# Altium PCB ctrl_lumier_pcb_backup.PcbDoc
Units mil, origin at the board's own origin, x right, y up, seen from the top; angles counter-clockwise.
Board outline 3490 x 1960 mil, 2 copper layers (Top Layer, Bottom Layer); 35 components, 47 nets, 162 pads, 29 vias.
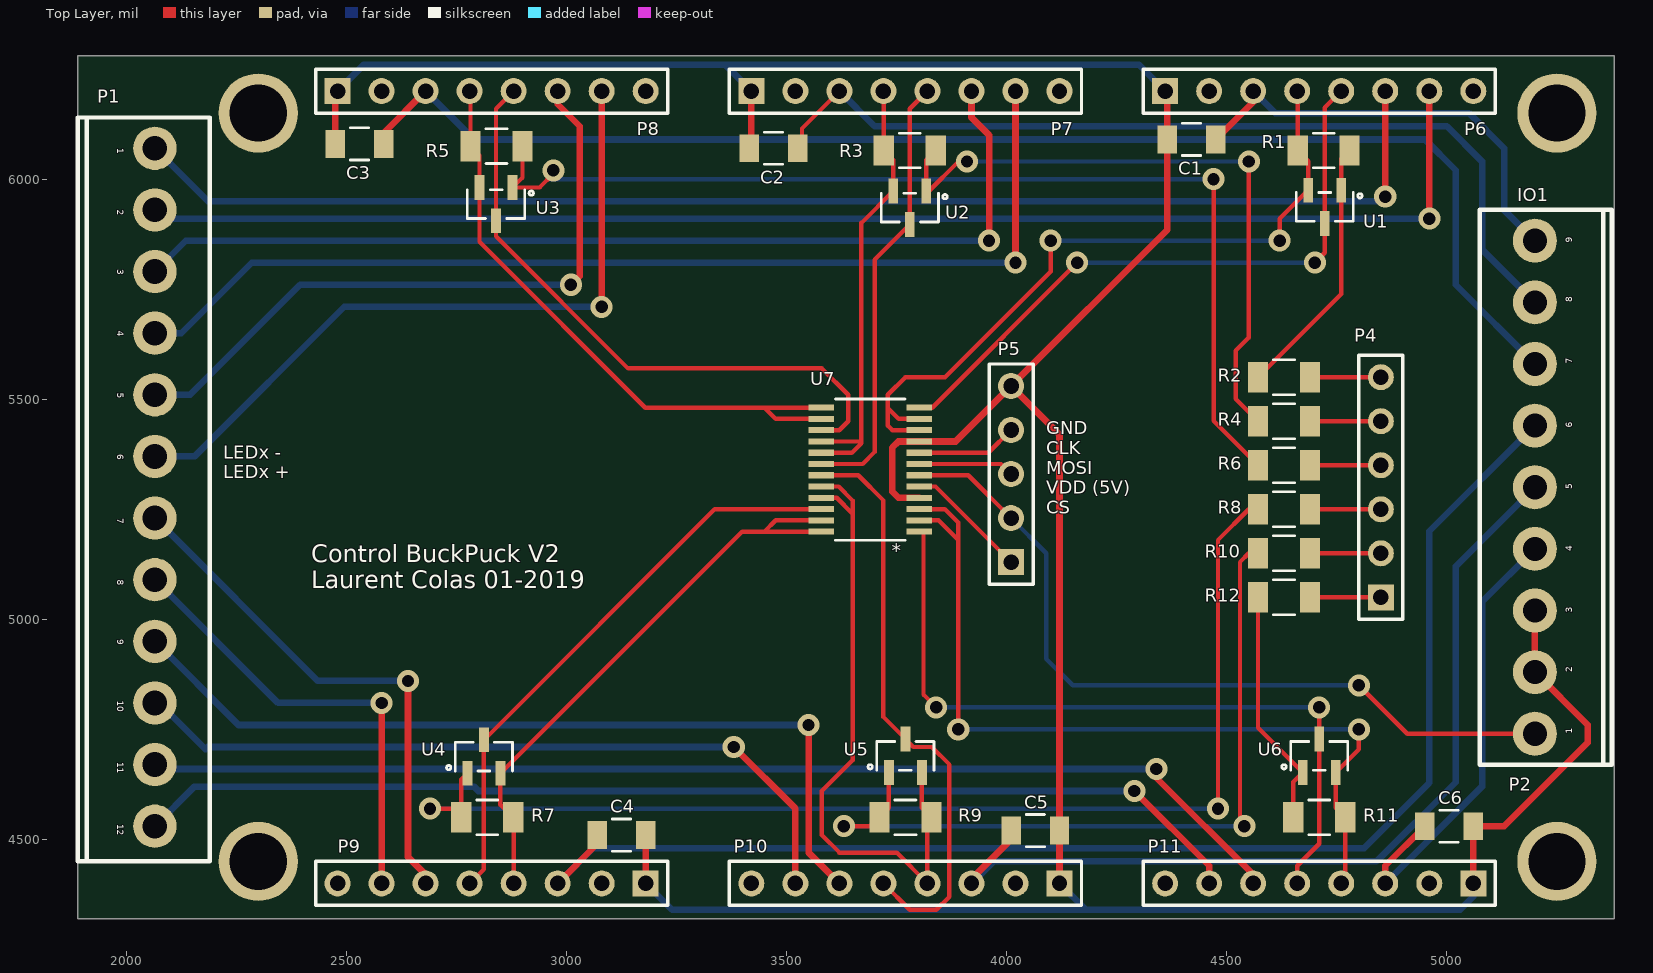
[diagram p0: Top Layer view]
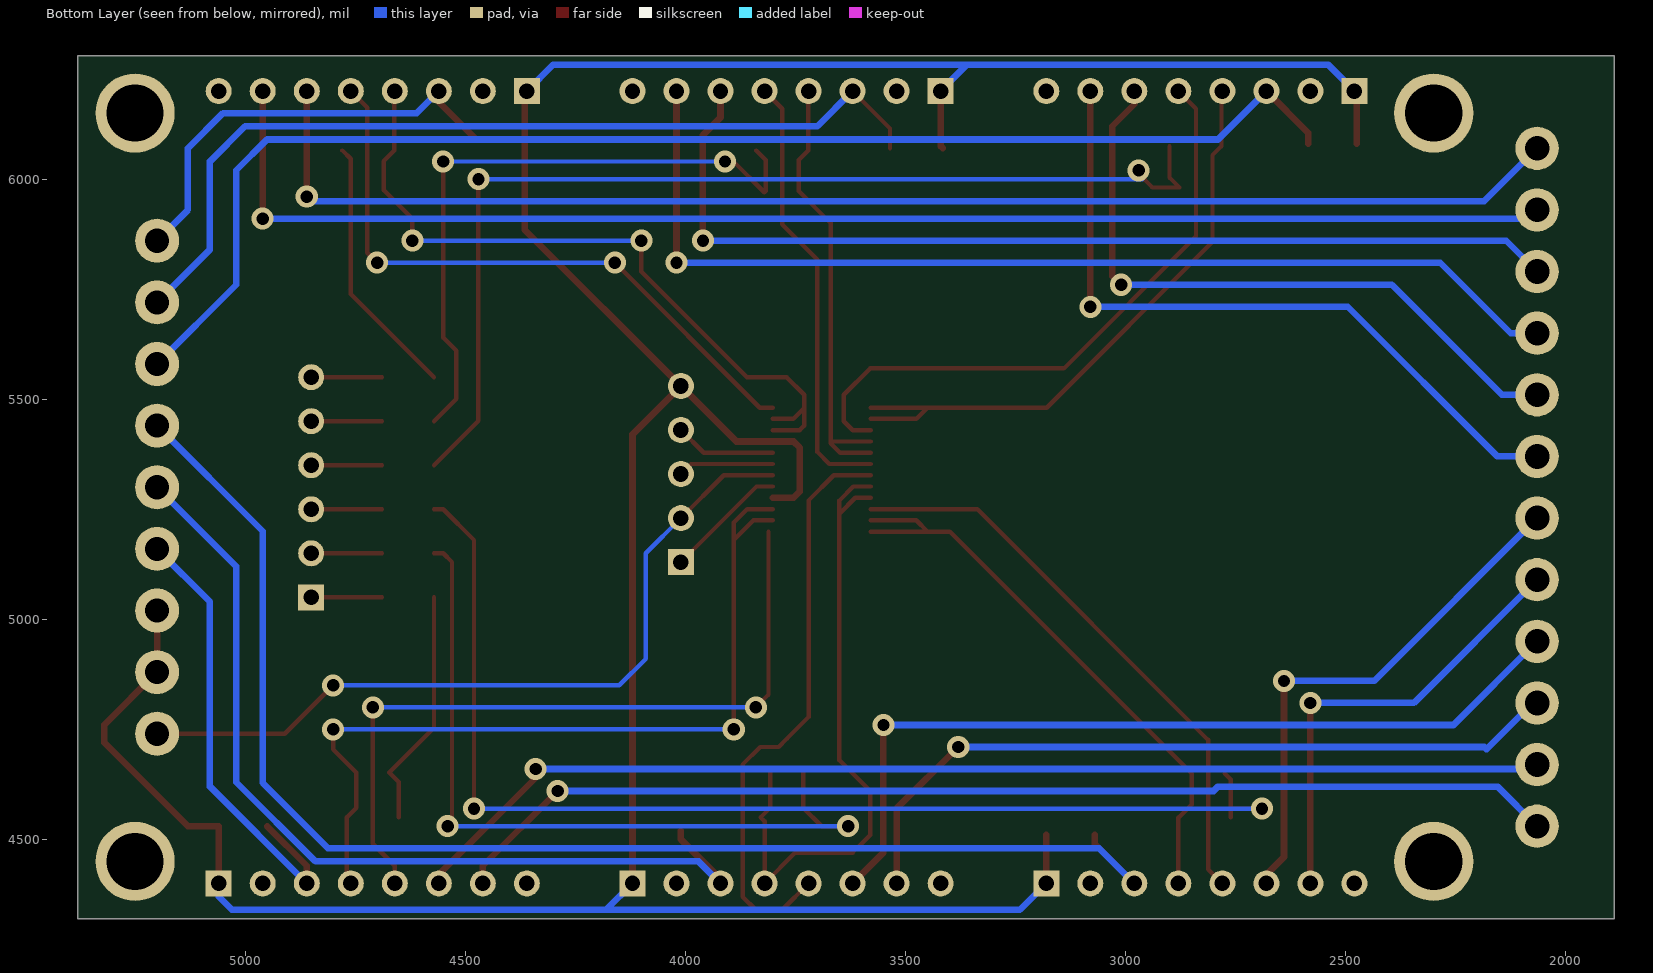
[diagram p1: Bottom Layer view, seen from below]

## Layer stack, top to bottom
Top Solder: solder mask 0.4, Solder Resist, Dk 3.5
Top Layer: signal copper 1.4
Dielectric 1: dielectric 12.6, FR-4, Dk 4.8
Bottom Layer: signal copper 1.4
Bottom Solder: solder mask 0.4, Solder Resist, Dk 3.5

## Board outline
1890,6280 5380,6280 5380,4320 1890,4320

## Design rules (kind name [scope] priority, off if disabled: settings)
Clearance [All] p1: gap=10 ignorepadtopadclearanceinfootprint=FALSE
ComponentClearance [All] p1: gap=0 collisioncheckmode=3 verticalgap=0 showdistances=FALSE
HoleSize [All] p1: absolutevalues=TRUE maxlimit=160 minlimit=1 maxpercent=80.000 minpercent=20.000
PolygonConnect PolygonConnect_5 [All vs IsNamedPolygon('GND_L02_P002')] p1: thpad.connectstyle=Direct thpad.reliefconductorwidth=10 thpad.reliefentries=4 thpad.polygonreliefangle="90 Angle" thpad.airgapwidth=10 smdpad.connectstyle=Direct smdpad.reliefconductorwidth=10 smdpad.reliefentries=4 smdpad.polygonreliefangle="90 Angle" smdpad.airgapwidth=10 via.connectstyle=Relief via.reliefconductorwidth=10 via.reliefentries=4 via.polygonreliefangle="90 Angle" via.airgapwidth=10
PolygonConnect PolygonConnect_4 [All vs IsNamedPolygon('GND_L01_P000')] p2: thpad.connectstyle=Direct thpad.reliefconductorwidth=10 thpad.reliefentries=4 thpad.polygonreliefangle="90 Angle" thpad.airgapwidth=10 smdpad.connectstyle=Direct smdpad.reliefconductorwidth=10 smdpad.reliefentries=4 smdpad.polygonreliefangle="90 Angle" smdpad.airgapwidth=10 via.connectstyle=Relief via.reliefconductorwidth=10 via.reliefentries=4 via.polygonreliefangle="90 Angle" via.airgapwidth=10
PolygonConnect PolygonConnect_3 [All vs IsNamedPolygon('GND_L01_P000')] p3: thpad.connectstyle=Direct thpad.reliefconductorwidth=10 thpad.reliefentries=4 thpad.polygonreliefangle="90 Angle" thpad.airgapwidth=10 smdpad.connectstyle=Relief smdpad.reliefconductorwidth=10 smdpad.reliefentries=4 smdpad.polygonreliefangle="90 Angle" smdpad.airgapwidth=10 via.connectstyle=Relief via.reliefconductorwidth=10 via.reliefentries=4 via.polygonreliefangle="90 Angle" via.airgapwidth=10
PolygonConnect PolygonConnect_2 [All vs IsNamedPolygon('GND_L01_P000')] p4: thpad.connectstyle=Direct thpad.reliefconductorwidth=10 thpad.reliefentries=4 thpad.polygonreliefangle="90 Angle" thpad.airgapwidth=10 smdpad.connectstyle=Direct smdpad.reliefconductorwidth=10 smdpad.reliefentries=4 smdpad.polygonreliefangle="90 Angle" smdpad.airgapwidth=10 via.connectstyle=Relief via.reliefconductorwidth=10 via.reliefentries=4 via.polygonreliefangle="90 Angle" via.airgapwidth=10
PolygonConnect PolygonConnect_1 [All vs IsNamedPolygon('GND_L01_P000')] p5: thpad.connectstyle=Direct thpad.reliefconductorwidth=10 thpad.reliefentries=4 thpad.polygonreliefangle="90 Angle" thpad.airgapwidth=10 smdpad.connectstyle=Direct smdpad.reliefconductorwidth=10 smdpad.reliefentries=4 smdpad.polygonreliefangle="90 Angle" smdpad.airgapwidth=10 via.connectstyle=Relief via.reliefconductorwidth=10 via.reliefentries=4 via.polygonreliefangle="90 Angle" via.airgapwidth=10
PolygonConnect [All] p6: connectstyle=Relief reliefconductorwidth=10 reliefentries=4 polygonreliefangle="90 Angle" airgapwidth=10
RoutingVias [All] p1: holewidth=25 width=40 viastyle="Through Hole" minholewidth=28 minwidth=50 maxholewidth=28 maxwidth=50
SilkToSilkClearance [All] p1: silktosilkclearance=0
SolderMaskExpansion [All] p1: expansion=4
UnRoutedNet [All] p1: checkbadconnections=TRUE
Width [All] p1: maxlimit=30 minlimit=8 preferedwidth=10
26 further rules are at their usual default settings.

## Components (designator, comment, footprint, x,y, rotation, side; value= is the part's Value field where it differs from the comment)
C1 "CapSMD" CC1206N 4420,6090 r0 top value=0.1u
C2 "CapSMD" CC1206N 3470,6070 r0 top value=0.1u
C3 "CapSMD" CC1206N 2530,6080 r0 top value=0.1u
C4 "CapSMD" CC1206N 3125,4510 r180 top value=0.1u
C5 "CapSMD" CC1206N 4065,4520 r180 top value=0.1u
C6 "CapSMD" CC1206N 5005,4530 r180 top value=0.1u
P1 "Header 12" "TERMINAL BLOCK 12 POS" 2190,6140 r270 top
P2 "Header 9" "Terminal block 9 pos" 5075,4670 r90 top
P4 "Header 6" HDR1X6 4850,5050 r90 top
P5 "Header 5" HDR1X5 4010,5130 r90 top
P6 "Header 8" HDR1X8 4360,6200 r0 top
P7 "Header 8" HDR1X8 3420,6200 r0 top
P8 "Header 8" HDR1X8 2480,6200 r0 top
P9 "Header 8" HDR1X8 3180,4400 r180 top
P10 "Header 8" HDR1X8 4120,4400 r180 top
P11 "Header 8" HDR1X8 5060,4400 r180 top
R1 "ResSMD" STA_RMCF1206 4720,6065 r180 top
R2 "ResSMD" STA_RMCF1206 4630,5550 r180 top
R3 "ResSMD" STA_RMCF1206 3780,6065 r180 top
R4 "ResSMD" STA_RMCF1206 4630,5450 r180 top
R5 "ResSMD" STA_RMCF1206 2841,6075 r180 top
R6 "ResSMD" STA_RMCF1206 4630,5350 r180 top
R7 "ResSMD" STA_RMCF1206 2820,4550 r0 top
R8 "ResSMD" STA_RMCF1206 4630,5250 r180 top
R9 "ResSMD" STA_RMCF1206 3770,4550 r0 top
R10 "ResSMD" STA_RMCF1206 4630,5150 r180 top
R11 "ResSMD" STA_RMCF1206 4710,4550 r0 top
R12 "ResSMD" STA_RMCF1206 4630,5050 r180 top
U1 "MMBT3906LT1G" SOT-23 4722.5,5937 r180 top
U2 "MMBT3906LT1G" SOT-23 3780,5935 r180 top
U3 "MMBT3906LT1G" SOT-23 2840,5943 r180 top
U4 "MMBT3906LT1G" SOT-23 2812.5,4688 r0 top
U5 "MMBT3906LT1G" SOT-23 3770,4690 r0 top
U6 "MMBT3906LT1G" SOT-23 4710,4690 r0 top
U7 "AD5206BRUZ10-RL7" RU_24 3690,5340 r180 top

## Footprints (in the part's own frame and the unit in brackets; to place one, negate y for a bottom-side part, rotate by r counter-clockwise, add the part's x,y. Pads: shape width x height; smd on the part's side, far side on the other; paste and mask are expansions set on the pad)
CC1206N [mil]
  rect 44x63 smd paste+0 mask+0: 1(-55,0) 2(55,0)
  silkscreen extent -21,-36 21,36
HDR1X5 [mm] "Connector; Header; 5 Position"
  rect 1.5x1.5 hole 0.9: 1(0,0)
  round 1.5 hole 0.9: 2(2.54,0) 3(5.08,0) 4(7.62,0) 5(10.16,0)
  silkscreen extent -1.27,-1.27 11.43,1.27
HDR1X6 [mm] "Connector; Header; 6 Position"
  rect 1.5x1.5 hole 0.9: 1(0,0)
  round 1.5 hole 0.9: 2(2.54,0) 3(5.08,0) 4(7.62,0) 5(10.16,0) 6(12.7,0)
  silkscreen extent -1.27,-1.27 13.97,1.27
HDR1X8 [mm] "Connector; Header; 8 Position"
  rect 1.5x1.5 hole 0.889: 1(0,0)
  round 1.5 hole 0.889: 2(2.54,0) 3(5.08,0) 4(7.62,0) 5(10.16,0) 6(12.7,0) 7(15.24,0) 8(17.78,0)
  silkscreen extent -1.27,-1.27 19.05,1.27
RU_24 [mil]
  rect 58x13.78 smd: 1(-111,140.75) 3(-111,89.57) 4(-111,63.98) 5(-111,38.39) 6(-111,12.8) 7(-111,-12.8) 8(-111,-38.39) 9(-111,-63.98) 10(-111,-89.57) 11(-111,-115.16) 12(-111,-140.75) 13(111,-140.75) 14(111,-115.16) 15(111,-89.57) 16(111,-63.98) 17(111,-38.39) 18(111,-12.8) 19(111,12.8) 20(111,38.39) 21(111,63.98) 22(111,89.57) 23(111,115.16) 24(111,140.75)
  rect 58x13.78 smd paste+0: 2(-111,115.16)
  silkscreen extent -79,-160 79,160
SOT-23 [mil]
  rect 22x56 smd: 1(-37.5,-38) 2(37.5,-38) 3(0,38)
  silkscreen extent -85,-33 65,33
STA_RMCF1206 [mil]
  rect 46x69 smd paste+0 mask+0: 1(-59,0) 2(59,0)
  silkscreen extent -24,-40 24,40
"Terminal block 9 pos" [mil]
  round 100 hole 55: 1(70,-125) 2(210,-125) 3(350,-125) 4(490,-125) 5(630,-125) 6(770,-125) 7(910,-125) 8(1050,-125) 9(1190,-125)
  silkscreen extent 0,-300 1260,0
"TERMINAL BLOCK 12 POS" [mm]
  round 2.5 hole 1.422: 1(1.778,-3.175) 2(5.334,-3.175) 3(8.89,-3.175) 4(12.446,-3.175) 5(16.002,-3.175) 6(19.558,-3.175) 7(23.114,-3.175) 8(26.67,-3.175) 9(30.226,-3.175) 10(33.782,-3.175) 11(37.338,-3.175) 12(40.894,-3.175)
  silkscreen extent 0,-7.62 42.93,0

## Part data
C1 C2 C3 C4 C5 C6: "Capacitor", Package=1206, Voltage=50V, Type=Ceramic
P1: "Header, 12-Pin", LatestRevisionDate=17-Jul-2002, LatestRevisionNote="Re-released for DXP Platform.", Publisher="Altium Limited"
P2: "Header, 9-Pin", LatestRevisionDate=17-Jul-2002, LatestRevisionNote="Re-released for DXP Platform.", Publisher="Altium Limited"
P4: "Header, 6-Pin", LatestRevisionDate=17-Jul-2002, LatestRevisionNote="Re-released for DXP Platform.", Publisher="Altium Limited"
P5: "Header, 5-Pin", LatestRevisionDate=17-Jul-2002, LatestRevisionNote="Re-released for DXP Platform.", Publisher="Altium Limited"
P6 P7 P8 P9 P10 P11: "Header, 8-Pin", LatestRevisionDate=17-Jul-2002, LatestRevisionNote="Re-released for DXP Platform.", Publisher="Altium Limited"
R1 R2 R3 R4 R5 R6 R7 R8 R9 R10 R11 R12: Package=1206
U1 U2 U3 U4 U5 U6: Built_By=EMA_UL_Team, C="Copyright (C) 2015 Accelerated Designs. All rights reserved", Manufacturer_Part_Number=MMBT3906LT1G, Vendor="ON Semiconductor"
U7: Built_By=EMA_UL_Team, C="Copyright (C) 2015 Accelerated Designs. All rights reserved", Manufacturer_Part_Number=AD5206BRUZ10-RL7, Vendor="Analog Devices Inc"

## Free pads (board coordinates)
  round 180 hole 130: ""(2300,4450) ""(2300,6150) ""(5250,4450) ""(5250,6150)

## Via types
v1: diameter 50, hole 28, Top Layer to Bottom Layer, 29 vias

## Nets (pads, with @x,y where several pads share a name; then routed paths per layer and width w, separated by ;. In a path a pad name is that pad's centre, name@x,y a point inside that pad or via, vN(x,y) a via of type N, cw(c..) or ccw(c..) an arc to the next point about the centre after c; other vN are vias at no path point)
CLK: P5.4 U7.8 | length 230.4
  Top Layer w10: U7.8 3958.39,5378.39 P5.4
CS: P5.1 U7.5 | length 280.1
  Top Layer w10: U7.5 3838.39,5301.61 P5.1
Ctrl_LED_1: P6.5 U1.3 U7.12 | length 1470.2
  Top Layer w10: U7.12 3830.75,5480.75 v1(4160,5810) v1@4160,5830 ; v1(4700,5810) 4722.5,5832.5 U1.3 4722.5,6162.5 P6.5
  Bottom Layer w10: v1(4160,5810) v1(4700,5810)
Ctrl_LED_2: P7.5 U2.3 U7.18 | length 1002
  Top Layer w10: U7.18 3672.8,5352.8 3700,5380 3700,5817 U2.3 3780,6160 P7.5
Ctrl_LED_3: P8.5 U3.3 U7.15 | length 1425.1
  Top Layer w10: P8.5 2840,6160 U3.3 2840,5870 3140,5570 3580,5570 3640,5510 3640,5450.16 3619.41,5429.57 U7.15
Ctrl_LED_4: P9.5 U4.3 U7.22 | length 1323.2
  Top Layer w10: P9.5 2812.5,4432.5 U4.3 3336.93,5250.43 U7.22
Ctrl_LED_5: P10.5 U5.3 U7.19 | length 1338.7
  Top Layer w10: U7.19 3662.8,5327.2 3720,5270 3720,4778 U5.3 3788,4710 3830,4710 3870,4670 3870,4370 3840,4340 3780,4340 P10.5
Ctrl_LED_6: P11.5 U6.3 U7.1 | length 1702
  Top Layer w10: U7.1@3811,5199.25 3811,4829 v1(3840,4800) ; P11.5 4660,4440 4710,4490 U6.3 v1(4710,4800)
  Bottom Layer w10: v1(3840,4800) v1(4710,4800)
Gnd: C1.1 C2.1 C3.1 C4.1 C5.1 C6.1 P2.2 P2.3 P5.5 P6.1 P7.1 P8.1 P9.1 P10.1 P11.1 U7.4 U7.9 | length 7718.7
  Top Layer w15: C3.1 2475,6195 P8.1 ; P9.1 C4.1 ; C2.1 3420,6075 P7.1 ; U7.4 3753.98,5276.02 3740,5290 3740,5390 3753.98,5403.98 U7.9 3883.98,5403.98 P5.5 ; P10.1 C5.1 4120,5420 P5.5 ; P6.1 4365,6195 C1.1 4365,5885 P5.5 ; P11.1 C6.1 5130,4530 5320,4720 5320,4760 P2.2 P2.3
  Bottom Layer w15: P8.1 2540,6260 3360,6260 ; P9.1 3240,4340 4180,4340 ; P7.1 3360,6260 ; P10.1 4180,4340 ; P6.1 4300,6260 3360,6260 ; P11.1 5060,4370 5030,4340 4180,4340
IO1: P4.6 R2.1 | length 161
  Top Layer w10: R2.1 P4.6
IO2: P4.5 R4.1 | length 161
  Top Layer w10: R4.1 P4.5
IO3: P4.4 R6.1 | length 161
  Top Layer w10: R6.1 P4.4
IO4: P4.3 R8.1 | length 161
  Top Layer w10: R8.1 P4.3
IO5: P4.2 R10.1 | length 161
  Top Layer w10: R10.1 P4.2
IO6: P4.1 R12.1 | length 161
  Top Layer w10: R12.1 P4.1
LED+1: P1.2 P6.7 | length 3193.3
  Top Layer w15: v1(4960,5910) P6.7
  Bottom Layer w15: P1.2 2085,5910 v1(4960,5910)
LED+2: P1.4 P7.7 | length 2411.3
  Top Layer w15: v1(4020,5810) P7.7
  Bottom Layer w15: P1.4 2125,5650 2285,5810 v1(4020,5810)
LED+3: P1.6 P8.7 | length 1650
  Top Layer w15: v1(3080,5710) 3080,6190 3085,6195 P8.7
  Bottom Layer w15: P1.6 2155,5370 2495,5710 v1(3080,5710)
LED+4: P1.8 P9.7 | length 1041
  Top Layer w15: P9.7 v1(2580,4810)
  Bottom Layer w15: P1.8 2345,4810 v1(2580,4810)
LED+5: P1.10 P10.7 | length 1738.6
  Top Layer w15: v1@3370,4710 v1(3380,4710) 3520,4570 P10.7
  Bottom Layer w15: P1.10 2075,4810 2180,4705 2185,4710 v1(3380,4710)
LED+6: P1.12 P11.7 | length 2546.8
  Top Layer w15: v1(4290,4610) 4460,4440 P11.7
  Bottom Layer w15: P1.12 2155,4620 2790,4620 2800,4610 v1(4290,4610)
LED-1: P1.1 P6.6 | length 3088.8
  Top Layer w15: v1(4860,5960) P6.6
  Bottom Layer w15: P1.1 2185,5950 4850,5950 v1(4860,5960)
LED-2: P1.3 P7.6 | length 2280.6
  Top Layer w15: P7.6 3920,6140 3960,6100 v1(3960,5860)
  Bottom Layer w15: P1.3 2135,5860 v1(3960,5860)
LED-3: P1.5 P8.6 | length 1517.5
  Top Layer w15: P8.6 2980,6170 3030,6120 3030,5780 v1(3010,5760)
  Bottom Layer w15: P1.5 2145,5510 2395,5760 v1(3010,5760)
LED-4: P1.7 P9.6 | length 1204.8
  Top Layer w15: v1(2640,4860) 2640,4460 2680,4420 P9.6
  Bottom Layer w15: P1.7 2435,4860 v1(2640,4860)
LED-5: P1.9 P10.6 | length 1952.7
  Top Layer w15: v1(3550,4760) 3550,4470 P10.6
  Bottom Layer w15: P1.9 2255,4760 v1(3550,4760)
LED-6: P1.11 P11.6 | length 2638.6
  Top Layer w15: v1(4340,4660) 4340,4640 4560,4420 P11.6
  Bottom Layer w15: P1.11 2075,4680 2095,4660 v1(4340,4660)
MOSI: P5.3 U7.7 | length 218.4
  Top Layer w10: U7.7 3987.2,5352.8 P5.3
NetR1_1: R1.1 R2.2 U1.1 | length 601.2
  Top Layer w10: R2.2 4760,5739 U1.1 4760,6046 R1.1
NetR3_1: R3.1 R4.2 U2.1 | length 1487.2
  Top Layer w10: R3.1 3817.5,6043.5 U2.1 3820.5,5970 3890.5,6040 v1(3910,6040) ; v1(4550,6040) 4550,5640 4520,5610 4520,5501 R4.2
  Bottom Layer w10: v1(3910,6040) v1(4550,6040)
NetR5_1: R5.1 R6.2 U3.1 | length 2439.8
  Top Layer w10: R5.1 2900,6003.5 U3.1 2939,5981 2970,6012 v1(2970,6020) ; v1(4470,6000) 4470,5451 R6.2
  Bottom Layer w10: v1(2970,6020) 2970,6008 2962,6000 v1(4470,6000)
NetR7_1: R7.1 R8.2 U4.1 | length 2696.8
  Top Layer w10: v1(2690,4570) R7.1@2761,4570 ; R7.1 R7.1@2761,4570 ; U4.1 2761,4636 R7.1@2761,4570 ; v1(4480,4570) 4480,5180 4550,5250 R8.2
  Bottom Layer w10: v1(2690,4570) v1(4480,4570)
NetR9_1: R9.1 R10.2 U5.1 | length 1794.4
  Top Layer w10: v1(3630,4530) 3690,4530 R9.1@3732.5,4572.5 ; R9.1 3732.5,4571.5 R9.1@3732.5,4572.5 ; U5.1 R9.1@3732.5,4572.5 ; v1(4540,4530) 4530,4540 4530,5130 4550,5150 R10.2
  Bottom Layer w10: v1(3630,4530) v1(4540,4530)
NetR11_1: R11.1 R12.2 U6.1 | length 550.9
  Top Layer w10: R12.2 4571,4753.5 U6.1 4651,4630.5 R11.1
Ref_LED_1: P6.4 R1.2 U1.2 U7.10 U7.11 | length 1679.9
  Top Layer w10: U7.10 3740.43,5429.57 3730,5440 3730,5480 ; U7.11 3754.84,5455.16 3730,5480 ; v1(4100,5860) 4100,5790 3860,5550 3770,5550 3730,5510 3730,5480 ; v1(4620,5860) 4620,5910 U1.2 4685,6041 R1.2 4661,6199 P6.4
  Bottom Layer w10: v1(4100,5860) v1(4620,5860)
Ref_LED_2: P7.4 R3.2 U2.2 U7.16 U7.17 | length 1032
  Top Layer w10: U7.17 3648.39,5378.39 3670,5400 ; U7.16 3666.02,5403.98 3670,5400 ; P7.4 3721,6199 R3.2 3742.5,6043.5 U2.2 3670,5900.5 3670,5400
Ref_LED_3: P8.4 R5.2 U3.2 U7.13 U7.14 | length 1424
  Top Layer w10: P8.4 2782,6198 R5.2 2802.5,6054.5 U3.2 2802.5,5857.5 3179.25,5480.75 3450,5480.75 ; U7.14 3475.59,5455.16 3450,5480.75 ; U7.13 3450,5480.75
Ref_LED_4: P9.4 R7.2 U4.2 U7.23 U7.24 | length 1358.5
  Top Layer w10: P9.4 2880,4549 R7.2 2850,4579 U4.2 3399.25,5199.25 3450,5199.25 ; U7.24 3450,5199.25 ; U7.23 3475.59,5224.84 3450,5199.25
Ref_LED_5: P10.4 R9.2 U5.2 U7.20 U7.21 | length 1509.2
  Top Layer w10: U7.21 3613.98,5276.02 3650,5240 ; U7.20 3618.39,5301.61 3650,5270 3650,5240 ; U5.2 3807.5,4571.5 R9.2 3820,4541 P10.4 3750,4470 3620,4470 3580,4510 3580,4610 3650,4680 3650,5240
Ref_LED_6: P11.4 R11.2 U6.2 U7.2 U7.3 | length 1973.6
  Top Layer w10: U7.2 3845.16,5224.84 3890,5180 ; U7.3 3859.57,5250.43 3890,5220 3890,5180 ; v1(3890,4750) 3890,5180 ; P11.4 4769,4409 R11.2 4747.5,4571.5 U6.2 4800,4704.5 v1(4800,4750)
  Bottom Layer w10: v1(3890,4750) v1(4800,4750)
VDD: P2.1 P5.2 U7.6 | length 1782.8
  Top Layer w10: U7.6 3912.8,5327.2 P5.2 ; v1(4800,4850) 4910,4740 P2.1
  Bottom Layer w10: P5.2 4090,5150 4090,4910 4150,4850 v1(4800,4850)
Vin1: C1.2 P2.9 P6.3 | length 1008.1
  Top Layer w15: C1.2 4560,6175 P6.3
  Bottom Layer w15: P6.3 4610,6150 5050,6150 5130,6070 5130,5930 P2.9
Vin2: C2.2 P2.8 P7.3 | length 2061.2
  Top Layer w10: C2.2@3535,6070 3535,6115 P7.3
  Bottom Layer w15: P7.3 3700,6120 5000,6120 5080,6040 5080,5840 P2.8
Vin3: C3.2 P2.7 P8.3 | length 3088.5
  Top Layer w15: C3.2 2585,6105 P8.3
  Bottom Layer w15: P8.3 2790,6090 4950,6090 5020,6020 5020,5760 P2.7
Vin4: C4.2 P2.6 P9.3 | length 3133
  Top Layer w15: P9.3 3070,4490 C4.2
  Bottom Layer w15: P9.3 3060,4480 4811.72,4480 4960,4628.28 4960,5200 P2.6
Vin5: C5.2 P2.5 P10.3 | length 2097.1
  Top Layer w15: P10.3 3920,4410 4010,4500 C5.2
  Bottom Layer w15: P10.3 3970,4450 4840,4450 5020,4630 5020,5120 P2.5
Vin6: C6.2 P2.4 P11.3 | length 1068.1
  Top Layer w15: P11.3 4860,4440 C6.2
  Bottom Layer w15: P11.3 5080,4620 5080,5040 P2.4
pads on no net: P6.2 P6.8 P7.2 P7.8 P8.2 P8.8 P9.2 P9.8 P10.2 P10.8 P11.2 P11.8

## Silkscreen, mask and mechanical layers (free items; w line width, h text height)
Top Overlay:
  text "IO1" at 5160,5950 h30
  text "LEDx - / LEDx +" at 2220,5320 h30
  text "GND / CLK / MOSI / VDD (5V) / CS" at 4090,5240 h30
  text "Control BuckPuck V2 / Laurent Colas 01-2019" at 2420,5070 h40
Mechanical 1:
  the board outline again, w10

## Text inside footprints (layer, text, board x,y; h text height)
P1: Top Overlay "7" at 1980,5230 h15 r270; Top Overlay "8" at 1980,5090 h15 r270; Top Overlay "9" at 1980,4955 h15 r270; Top Overlay "10" at 1980,4815 h15 r270; Top Overlay "11" at 1980,4675 h15 r270; Top Overlay "12" at 1980,4535 h15 r270; Top Overlay "6" at 1980,5375 h15 r270; Top Overlay "5" at 1980,5515 h15 r270; Top Overlay "4" at 1980,5655 h15 r270; Top Overlay "3" at 1980,5795 h15 r270; Top Overlay "2" at 1980,5930 h15 r270; Top Overlay "1" at 1980,6070 h15 r270
P2: Top Overlay "1" at 5285,4740 h15 r90; Top Overlay "2" at 5285,4880 h15 r90; Top Overlay "3" at 5285,5015 h15 r90; Top Overlay "4" at 5285,5155 h15 r90; Top Overlay "5" at 5285,5295 h15 r90; Top Overlay "6" at 5285,5435 h15 r90; Top Overlay "9" at 5285,5855 h15 r90; Top Overlay "8" at 5285,5720 h15 r90; Top Overlay "7" at 5285,5580 h15 r90
U7: Top Overlay "*" at 3760,5185 h31.25 r180